# EAGLE board dense-DIP-adapter (EAGLE 6.5.0)
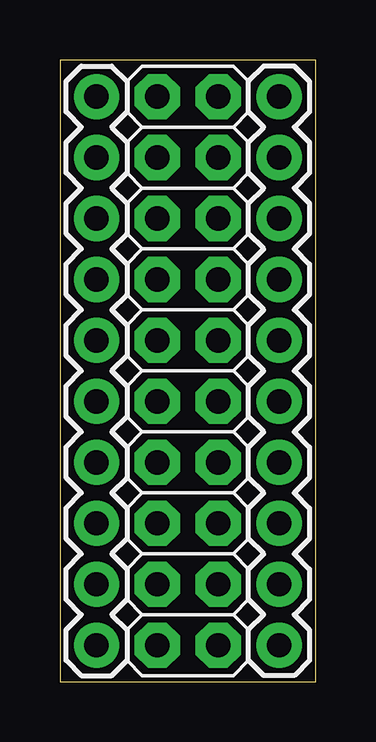
[diagram p0: board, top side]
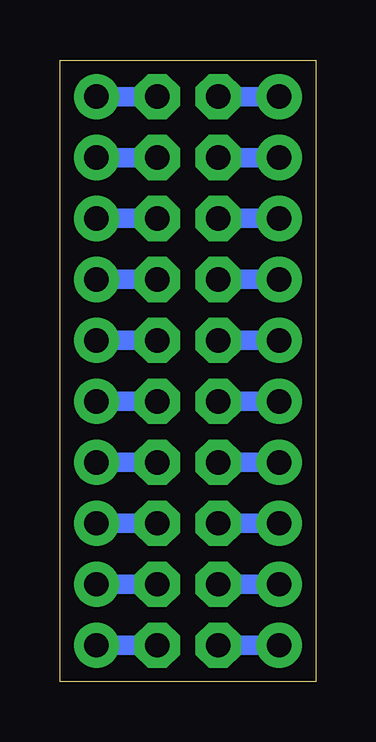
[diagram p1: board, bottom side, seen from below]

Size 10.67 x 25.91 mm. Coordinates in mm from the lower left corner, seen from the top.
Outline: 0,25.91 0,0 10.67,0 10.67,25.91 0,25.91
Copper layers (1*16): Top 0.0356mm / dielectric 1.5011mm / Bottom 0.0356mm
Design rules "LaenPCBOrder": minimum track width 6mil, minimum drill 13mil, track to track 6mil, track to pad 6mil, pad to pad 6mil, via to via 6mil, smd to smd 6mil, copper to edge 15mil, drill to drill 6mil, minimum pad ring 7mil, minimum via ring 7mil, stop-mask expansion 3mil, vias tented up to drill 0mil, thermal gap 10mil

## Footprints (pad centres in the part's own frame; a part is rotated, then mirrored left to right if it is on the bottom)
1X10 = drill 1.016 pad 1.88: 1 0,0; 2 2.54,0; 3 5.08,0; 4 7.62,0; 5 10.16,0; 6 12.7,0; 7 15.24,0; 8 17.78,0; 9 20.32,0; 10 22.86,0
2X10 = drill 1.016 pad 1.88 octagon: 1 -11.43,-1.27; 2 -11.43,1.27; 3 -8.89,-1.27; 4 -8.89,1.27; 5 -6.35,-1.27; 6 -6.35,1.27; 7 -3.81,-1.27; 8 -3.81,1.27; 9 -1.27,-1.27; 10 -1.27,1.27; 11 1.27,-1.27; 12 1.27,1.27; 13 3.81,-1.27; 14 3.81,1.27; 15 6.35,-1.27; 16 6.35,1.27; 17 8.89,-1.27; 18 8.89,1.27; 19 11.43,-1.27; 20 11.43,1.27

## Placement (x,y rotation side)
JP1  M10"  [1X10]  9.14,24.38 270 top
JP2  M10"  [1X10]  1.52,1.52 90 top
U$1  M10X2  [2X10]  5.33,12.95 90 top

## Library data of the parts
JP1 JP2 U$1 = SparkFun-Connectors

## Nets
N$1: JP1.10 U$1.1
N$2: JP1.9 U$1.3
N$3: JP1.8 U$1.5
N$4: JP1.7 U$1.7
N$5: JP1.6 U$1.9
N$6: JP1.5 U$1.11
N$7: JP1.4 U$1.13
N$8: JP1.3 U$1.15
N$9: JP1.2 U$1.17
N$10: JP1.1 U$1.19
N$11: JP2.10 U$1.20
N$12: JP2.9 U$1.18
N$13: JP2.8 U$1.16
N$14: JP2.7 U$1.14
N$15: JP2.6 U$1.12
N$16: JP2.5 U$1.10
N$17: JP2.4 U$1.8
N$18: JP2.3 U$1.6
N$19: JP2.2 U$1.4
N$20: JP2.1 U$1.2

## Tracks (layer width: path | path; a pad name or v marks a point on that pad's centre or on a via)
N$1
  Bottom 0.813: U$1.1 JP1.10
N$2
  Bottom 0.813: U$1.3 JP1.9
N$3
  Bottom 0.813: U$1.5 JP1.8
N$4
  Bottom 0.813: U$1.7 JP1.7
N$5
  Bottom 0.813: U$1.9 JP1.6
N$6
  Bottom 0.813: U$1.11 JP1.5
N$7
  Bottom 0.813: U$1.13 JP1.4
N$8
  Bottom 0.813: U$1.15 JP1.3
N$9
  Bottom 0.813: U$1.17 JP1.2
N$10
  Bottom 0.813: U$1.19 JP1.1
N$11
  Bottom 0.813: JP2.10 U$1.20
N$12
  Bottom 0.813: JP2.9 U$1.18
N$13
  Bottom 0.813: JP2.8 U$1.16
N$14
  Bottom 0.813: JP2.7 U$1.14
N$15
  Bottom 0.813: JP2.6 U$1.12
N$16
  Bottom 0.813: JP2.5 U$1.10
N$17
  Bottom 0.813: JP2.4 U$1.8
N$18
  Bottom 0.813: JP2.3 U$1.6
N$19
  Bottom 0.813: JP2.2 U$1.4
N$20
  Bottom 0.813: JP2.1 U$1.2